# EAGLE board SparkFun_Pressure_Breakout-MPL115A1_Panel_v10 (EAGLE 7.5.0), part 1 of 2
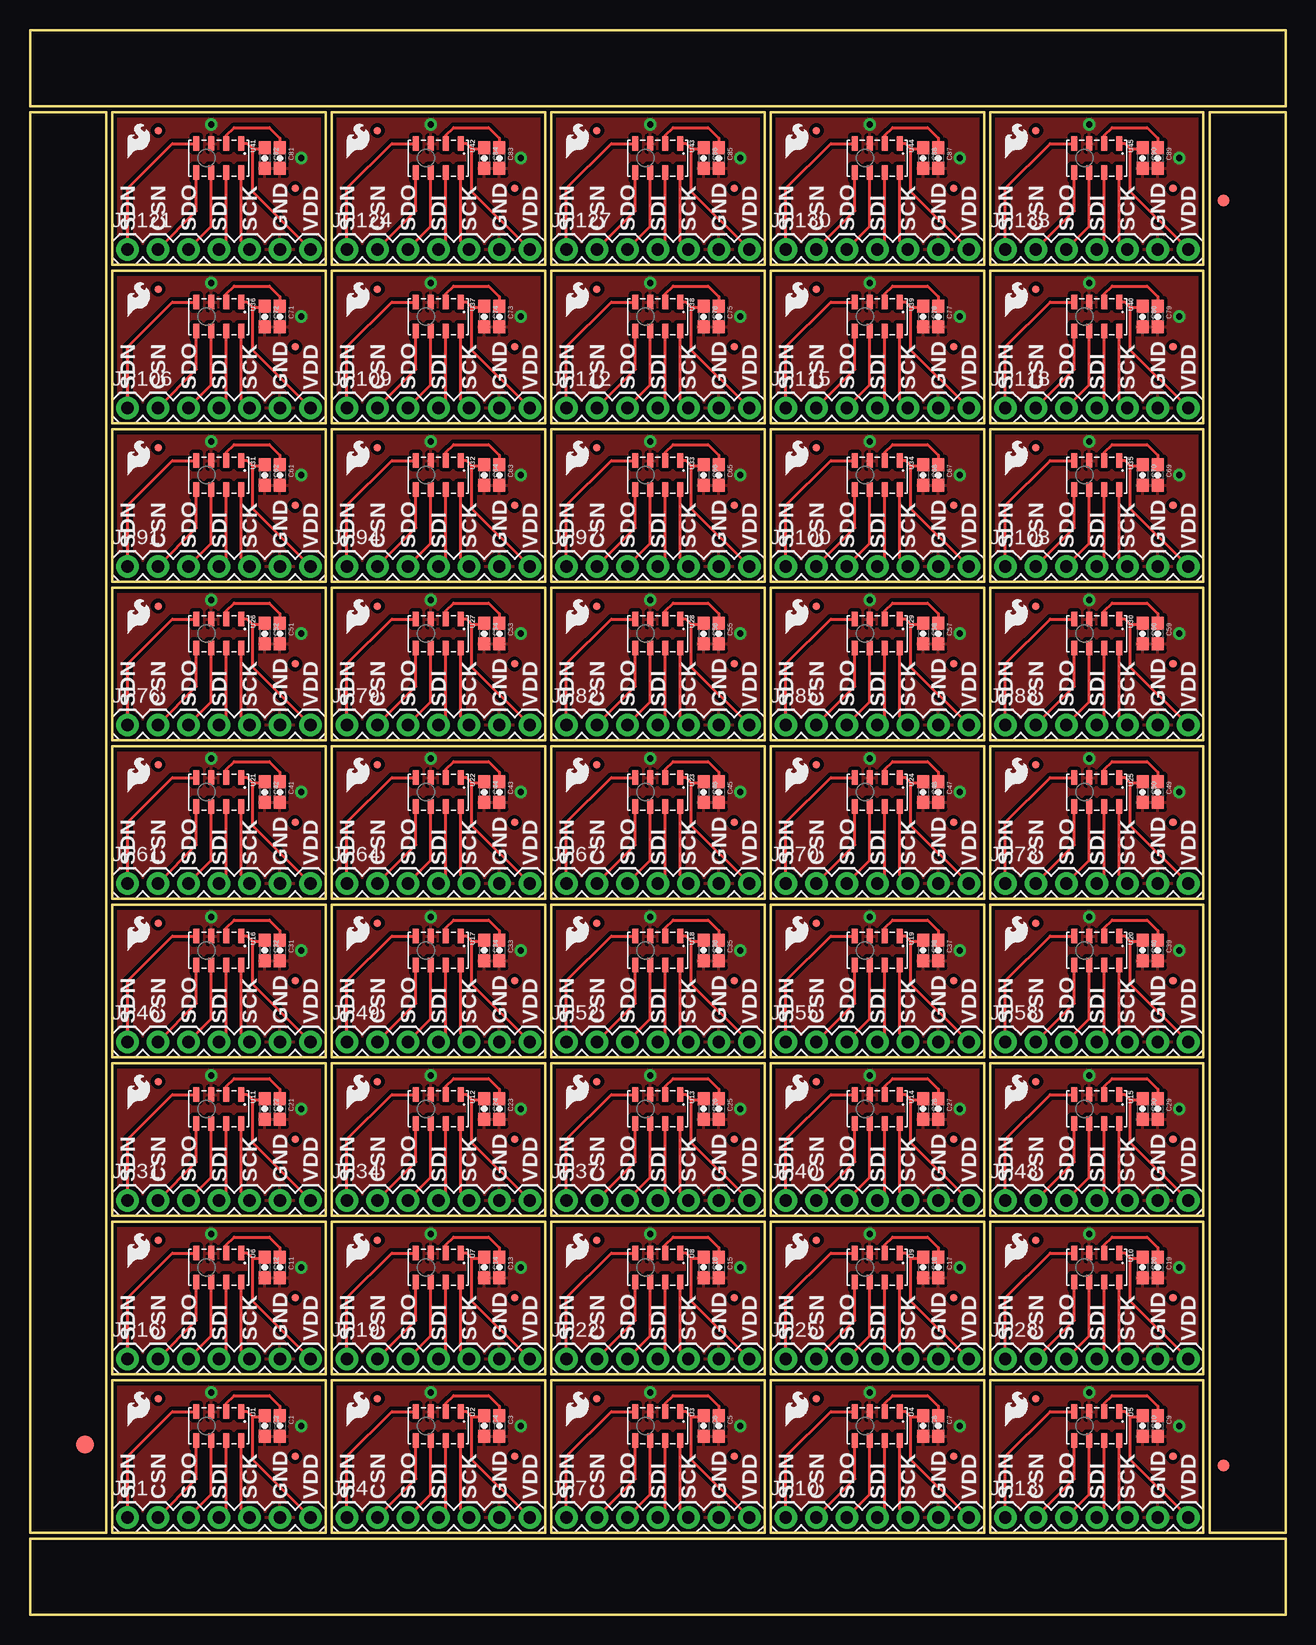
[diagram p0: board, top side]
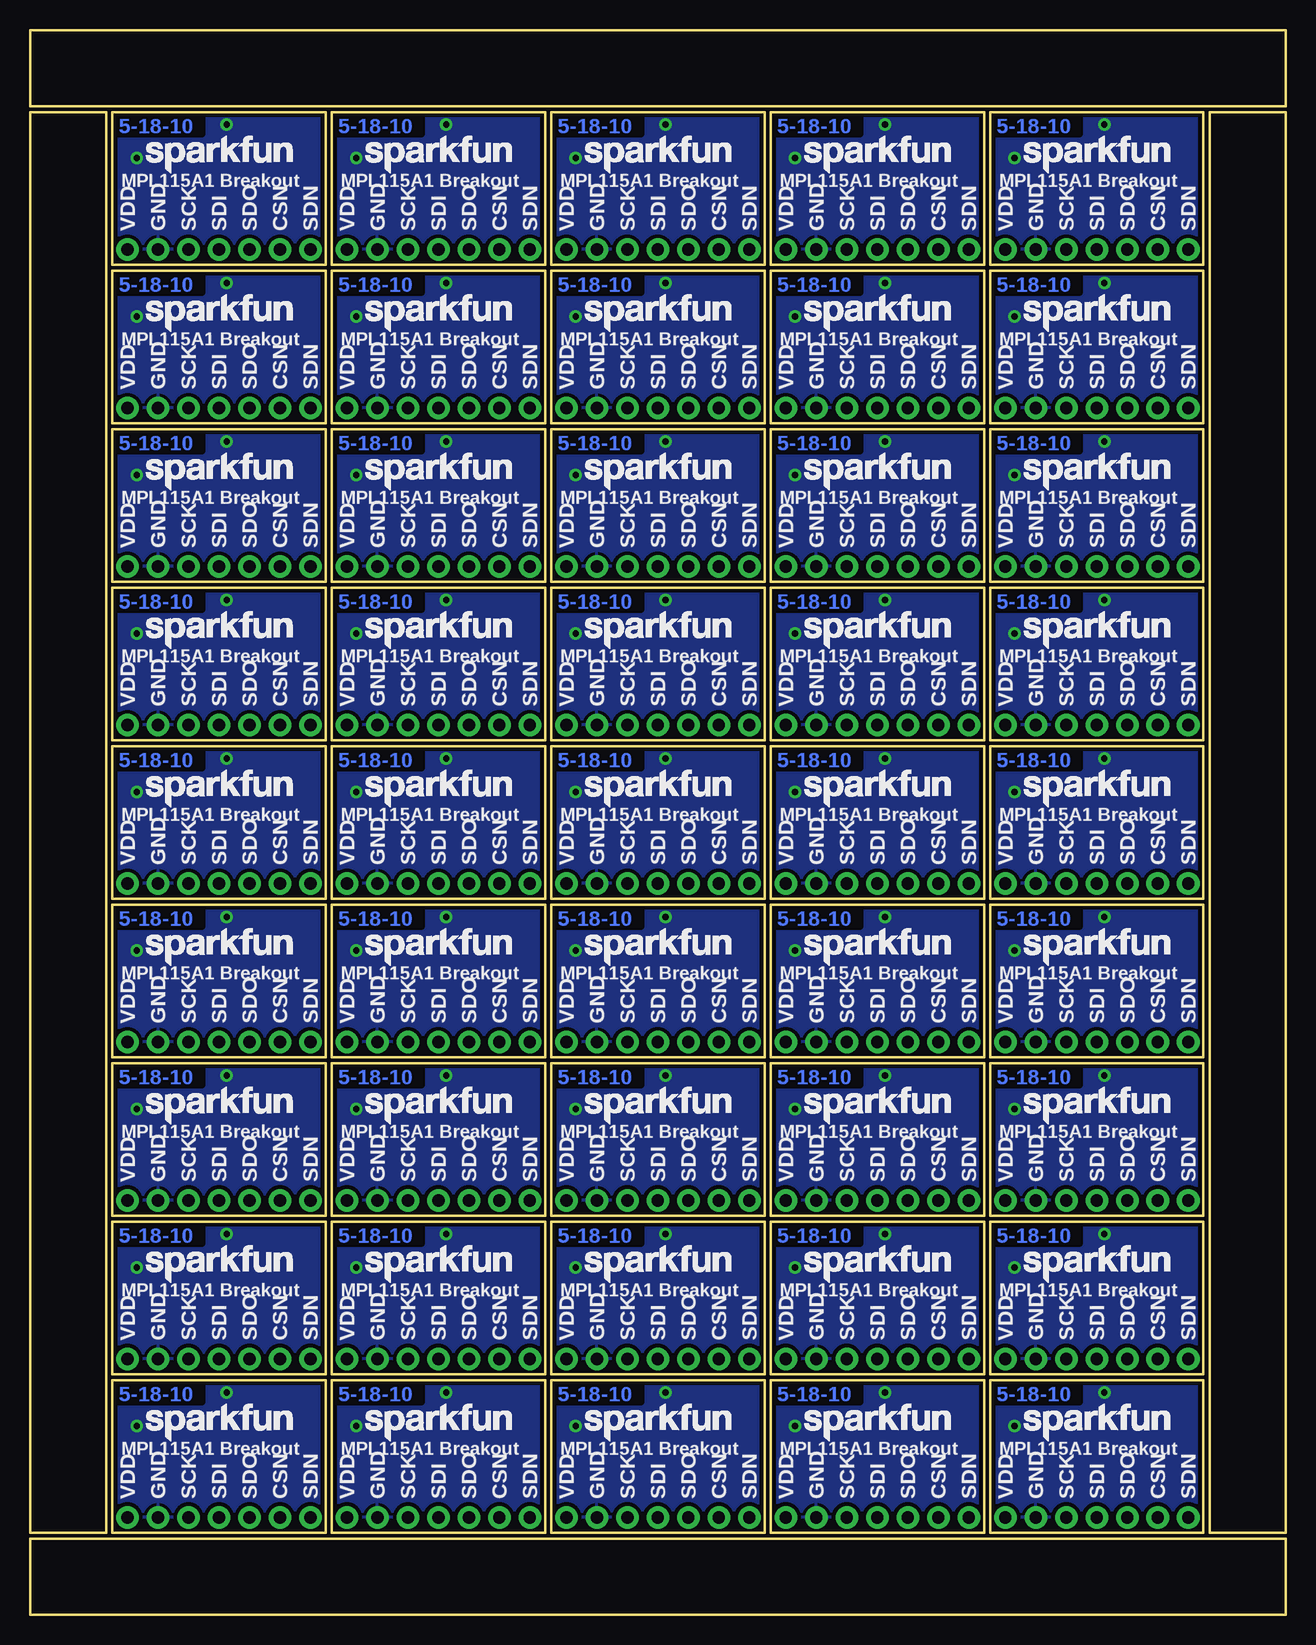
[diagram p1: board, bottom side, seen from below]

Size 104.65 x 132.08 mm. Coordinates in mm from the lower left corner, seen from the top.
Outline: 6.35,79.25 6.35,6.86 0,6.86 0,29.72
Outline: 0,27.18 0,125.22 6.35,125.22 6.35,76.71
Outline: 79.25,0 0,0 0,6.35 29.72,6.35
Outline: 27.18,6.35 104.65,6.35 104.65,0 76.71,0
Outline: 104.65,79.25 104.65,6.86 98.3,6.86 98.3,29.72
Outline: 98.3,27.18 98.3,125.22 104.65,125.22 104.65,76.71
Outline: 25.4,132.08 104.65,132.08 104.65,125.73 74.93,125.73
Outline: 77.47,125.73 0,125.73 0,132.08 27.94,132.08
Outline: 6.86,19.56 24.64,19.56 24.64,6.86 6.86,6.86 6.86,19.56
Outline: 25.15,19.56 42.93,19.56 42.93,6.86 25.15,6.86 25.15,19.56
Outline: 43.43,19.56 61.21,19.56 61.21,6.86 43.43,6.86 43.43,19.56
Outline: 61.72,19.56 79.5,19.56 79.5,6.86 61.72,6.86 61.72,19.56
Outline: 80.01,19.56 97.79,19.56 97.79,6.86 80.01,6.86 80.01,19.56
Outline: 6.86,32.77 24.64,32.77 24.64,20.07 6.86,20.07 6.86,32.77
Outline: 25.15,32.77 42.93,32.77 42.93,20.07 25.15,20.07 25.15,32.77
Outline: 43.43,32.77 61.21,32.77 61.21,20.07 43.43,20.07 43.43,32.77
Outline: 61.72,32.77 79.5,32.77 79.5,20.07 61.72,20.07 61.72,32.77
Outline: 80.01,32.77 97.79,32.77 97.79,20.07 80.01,20.07 80.01,32.77
Outline: 6.86,45.97 24.64,45.97 24.64,33.27 6.86,33.27 6.86,45.97
Outline: 25.15,45.97 42.93,45.97 42.93,33.27 25.15,33.27 25.15,45.97
Outline: 43.43,45.97 61.21,45.97 61.21,33.27 43.43,33.27 43.43,45.97
Outline: 61.72,45.97 79.5,45.97 79.5,33.27 61.72,33.27 61.72,45.97
Outline: 80.01,45.97 97.79,45.97 97.79,33.27 80.01,33.27 80.01,45.97
Outline: 6.86,59.18 24.64,59.18 24.64,46.48 6.86,46.48 6.86,59.18
Outline: 25.15,59.18 42.93,59.18 42.93,46.48 25.15,46.48 25.15,59.18
Outline: 43.43,59.18 61.21,59.18 61.21,46.48 43.43,46.48 43.43,59.18
Outline: 61.72,59.18 79.5,59.18 79.5,46.48 61.72,46.48 61.72,59.18
Outline: 80.01,59.18 97.79,59.18 97.79,46.48 80.01,46.48 80.01,59.18
Outline: 6.86,72.39 24.64,72.39 24.64,59.69 6.86,59.69 6.86,72.39
Outline: 25.15,72.39 42.93,72.39 42.93,59.69 25.15,59.69 25.15,72.39
Outline: 43.43,72.39 61.21,72.39 61.21,59.69 43.43,59.69 43.43,72.39
Outline: 61.72,72.39 79.5,72.39 79.5,59.69 61.72,59.69 61.72,72.39
Outline: 80.01,72.39 97.79,72.39 97.79,59.69 80.01,59.69 80.01,72.39
Outline: 6.86,85.6 24.64,85.6 24.64,72.9 6.86,72.9 6.86,85.6
Outline: 25.15,85.6 42.93,85.6 42.93,72.9 25.15,72.9 25.15,85.6
Outline: 43.43,85.6 61.21,85.6 61.21,72.9 43.43,72.9 43.43,85.6
Outline: 61.72,85.6 79.5,85.6 79.5,72.9 61.72,72.9 61.72,85.6
Outline: 80.01,85.6 97.79,85.6 97.79,72.9 80.01,72.9 80.01,85.6
Outline: 6.86,98.81 24.64,98.81 24.64,86.11 6.86,86.11 6.86,98.81
Outline: 25.15,98.81 42.93,98.81 42.93,86.11 25.15,86.11 25.15,98.81
Outline: 43.43,98.81 61.21,98.81 61.21,86.11 43.43,86.11 43.43,98.81
Outline: 61.72,98.81 79.5,98.81 79.5,86.11 61.72,86.11 61.72,98.81
Outline: 80.01,98.81 97.79,98.81 97.79,86.11 80.01,86.11 80.01,98.81
Outline: 6.86,112.01 24.64,112.01 24.64,99.31 6.86,99.31 6.86,112.01
Outline: 25.15,112.01 42.93,112.01 42.93,99.31 25.15,99.31 25.15,112.01
Outline: 43.43,112.01 61.21,112.01 61.21,99.31 43.43,99.31 43.43,112.01
Outline: 61.72,112.01 79.5,112.01 79.5,99.31 61.72,99.31 61.72,112.01
Outline: 80.01,112.01 97.79,112.01 97.79,99.31 80.01,99.31 80.01,112.01
Outline: 6.86,125.22 24.64,125.22 24.64,112.52 6.86,112.52 6.86,125.22
Outline: 25.15,125.22 42.93,125.22 42.93,112.52 25.15,112.52 25.15,125.22
Outline: 43.43,125.22 61.21,125.22 61.21,112.52 43.43,112.52 43.43,125.22
Outline: 61.72,125.22 79.5,125.22 79.5,112.52 61.72,112.52 61.72,125.22
Outline: 80.01,125.22 97.79,125.22 97.79,112.52 80.01,112.52 80.01,125.22
Copper layers (1*16): Top 0.035mm / dielectric 1.5mm / Bottom 0.035mm
Design rules "SparkFun": minimum track width 8mil, minimum drill 20mil, track to track 8mil, track to pad 8mil, pad to pad 8mil, via to via 8mil, smd to smd 8mil, copper to edge 9mil, drill to drill 8mil, minimum pad ring 12mil, minimum via ring 10mil, stop-mask expansion 4mil, vias tented up to drill 20mil, thermal gap 10mil

## Footprints (pad centres in the part's own frame; a part is rotated, then mirrored left to right if it is on the bottom)
0603-CAP = smd 1.1 x 1: 1 -0.85,0; 2 0.85,0
FIDUCIAL-1.5X3 = smd 1.5 x 1.5: 1 0,0
FIDUCIAL-1X2 = smd 1 x 1: 1 0,0
MICRO-FIDUCIAL = smd 0.635 x 0.635: 1 0,0
1X07 = drill 1.016 pad 1.88: 1 0,0; 2 2.54,0; 3 5.08,0; 4 7.62,0; 5 10.16,0; 6 12.7,0; 7 15.24,0
LGA8 = smd 1.2 x 0.5: 1 -1.2,1.875; 2 -1.2,0.625; 3 -1.2,-0.625; 4 -1.2,-1.875; 5 1.2,-1.875; 6 1.2,-0.625; 7 1.2,0.625; 8 1.2,1.875

## Placement (x,y rotation side)
C1  1uF  [0603-CAP]  20.83,15.75 270 top
C2  1uF  [0603-CAP]  19.56,15.75 270 top
C3  1uF  [0603-CAP]  39.12,15.75 270 top
C4  1uF  [0603-CAP]  37.85,15.75 270 top
C5  1uF  [0603-CAP]  57.4,15.75 270 top
C6  1uF  [0603-CAP]  56.13,15.75 270 top
C7  1uF  [0603-CAP]  75.69,15.75 270 top
C8  1uF  [0603-CAP]  74.42,15.75 270 top
C9  1uF  [0603-CAP]  93.98,15.75 270 top
C10  1uF  [0603-CAP]  92.71,15.75 270 top
C11  1uF  [0603-CAP]  20.83,28.96 270 top
C12  1uF  [0603-CAP]  19.56,28.96 270 top
C13  1uF  [0603-CAP]  39.12,28.96 270 top
C14  1uF  [0603-CAP]  37.85,28.96 270 top
C15  1uF  [0603-CAP]  57.4,28.96 270 top
C16  1uF  [0603-CAP]  56.13,28.96 270 top
C17  1uF  [0603-CAP]  75.69,28.96 270 top
C18  1uF  [0603-CAP]  74.42,28.96 270 top
C19  1uF  [0603-CAP]  93.98,28.96 270 top
C20  1uF  [0603-CAP]  92.71,28.96 270 top
C21  1uF  [0603-CAP]  20.83,42.16 270 top
C22  1uF  [0603-CAP]  19.56,42.16 270 top
C23  1uF  [0603-CAP]  39.12,42.16 270 top
C24  1uF  [0603-CAP]  37.85,42.16 270 top
C25  1uF  [0603-CAP]  57.4,42.16 270 top
C26  1uF  [0603-CAP]  56.13,42.16 270 top
C27  1uF  [0603-CAP]  75.69,42.16 270 top
C28  1uF  [0603-CAP]  74.42,42.16 270 top
C29  1uF  [0603-CAP]  93.98,42.16 270 top
C30  1uF  [0603-CAP]  92.71,42.16 270 top
C31  1uF  [0603-CAP]  20.83,55.37 270 top
C32  1uF  [0603-CAP]  19.56,55.37 270 top
C33  1uF  [0603-CAP]  39.12,55.37 270 top
C34  1uF  [0603-CAP]  37.85,55.37 270 top
C35  1uF  [0603-CAP]  57.4,55.37 270 top
C36  1uF  [0603-CAP]  56.13,55.37 270 top
C37  1uF  [0603-CAP]  75.69,55.37 270 top
C38  1uF  [0603-CAP]  74.42,55.37 270 top
C39  1uF  [0603-CAP]  93.98,55.37 270 top
C40  1uF  [0603-CAP]  92.71,55.37 270 top
C41  1uF  [0603-CAP]  20.83,68.58 270 top
C42  1uF  [0603-CAP]  19.56,68.58 270 top
C43  1uF  [0603-CAP]  39.12,68.58 270 top
C44  1uF  [0603-CAP]  37.85,68.58 270 top
C45  1uF  [0603-CAP]  57.4,68.58 270 top
C46  1uF  [0603-CAP]  56.13,68.58 270 top
C47  1uF  [0603-CAP]  75.69,68.58 270 top
C48  1uF  [0603-CAP]  74.42,68.58 270 top
C49  1uF  [0603-CAP]  93.98,68.58 270 top
C50  1uF  [0603-CAP]  92.71,68.58 270 top
C51  1uF  [0603-CAP]  20.83,81.79 270 top
C52  1uF  [0603-CAP]  19.56,81.79 270 top
C53  1uF  [0603-CAP]  39.12,81.79 270 top
C54  1uF  [0603-CAP]  37.85,81.79 270 top
C55  1uF  [0603-CAP]  57.4,81.79 270 top
C56  1uF  [0603-CAP]  56.13,81.79 270 top
C57  1uF  [0603-CAP]  75.69,81.79 270 top
C58  1uF  [0603-CAP]  74.42,81.79 270 top
C59  1uF  [0603-CAP]  93.98,81.79 270 top
C60  1uF  [0603-CAP]  92.71,81.79 270 top
C61  1uF  [0603-CAP]  20.83,95 270 top
C62  1uF  [0603-CAP]  19.56,95 270 top
C63  1uF  [0603-CAP]  39.12,95 270 top
C64  1uF  [0603-CAP]  37.85,95 270 top
C65  1uF  [0603-CAP]  57.4,95 270 top
C66  1uF  [0603-CAP]  56.13,95 270 top
C67  1uF  [0603-CAP]  75.69,95 270 top
C68  1uF  [0603-CAP]  74.42,95 270 top
C69  1uF  [0603-CAP]  93.98,95 270 top
C70  1uF  [0603-CAP]  92.71,95 270 top
C71  1uF  [0603-CAP]  20.83,108.2 270 top
C72  1uF  [0603-CAP]  19.56,108.2 270 top
C73  1uF  [0603-CAP]  39.12,108.2 270 top
C74  1uF  [0603-CAP]  37.85,108.2 270 top
C75  1uF  [0603-CAP]  57.4,108.2 270 top
C76  1uF  [0603-CAP]  56.13,108.2 270 top
C77  1uF  [0603-CAP]  75.69,108.2 270 top
C78  1uF  [0603-CAP]  74.42,108.2 270 top
C79  1uF  [0603-CAP]  93.98,108.2 270 top
C80  1uF  [0603-CAP]  92.71,108.2 270 top
C81  1uF  [0603-CAP]  20.83,121.41 270 top
C82  1uF  [0603-CAP]  19.56,121.41 270 top
C83  1uF  [0603-CAP]  39.12,121.41 270 top
C84  1uF  [0603-CAP]  37.85,121.41 270 top
C85  1uF  [0603-CAP]  57.4,121.41 270 top
C86  1uF  [0603-CAP]  56.13,121.41 270 top
C87  1uF  [0603-CAP]  75.69,121.41 270 top
C88  1uF  [0603-CAP]  74.42,121.41 270 top
C89  1uF  [0603-CAP]  93.98,121.41 270 top
C90  1uF  [0603-CAP]  92.71,121.41 270 top
E$1  [FIDUCIAL-1.5X3]  4.57,14.22 0 top
E$5  [FIDUCIAL-1X2]  99.44,12.45 0 top
E$6  [FIDUCIAL-1X2]  99.44,117.86 180 top
FID1  FIDUCIALUFIDUCIAL  [MICRO-FIDUCIAL]  10.67,18.03 0 top
FID2  FIDUCIALUFIDUCIAL  [MICRO-FIDUCIAL]  22.1,13.21 0 top
FID3  FIDUCIALUFIDUCIAL  [MICRO-FIDUCIAL]  28.96,18.03 0 top
FID4  FIDUCIALUFIDUCIAL  [MICRO-FIDUCIAL]  40.39,13.21 0 top
FID5  FIDUCIALUFIDUCIAL  [MICRO-FIDUCIAL]  47.24,18.03 0 top
FID6  FIDUCIALUFIDUCIAL  [MICRO-FIDUCIAL]  58.67,13.21 0 top
FID7  FIDUCIALUFIDUCIAL  [MICRO-FIDUCIAL]  65.53,18.03 0 top
FID8  FIDUCIALUFIDUCIAL  [MICRO-FIDUCIAL]  76.96,13.21 0 top
FID9  FIDUCIALUFIDUCIAL  [MICRO-FIDUCIAL]  83.82,18.03 0 top
FID10  FIDUCIALUFIDUCIAL  [MICRO-FIDUCIAL]  95.25,13.21 0 top
FID11  FIDUCIALUFIDUCIAL  [MICRO-FIDUCIAL]  10.67,31.24 0 top
FID12  FIDUCIALUFIDUCIAL  [MICRO-FIDUCIAL]  22.1,26.42 0 top
FID13  FIDUCIALUFIDUCIAL  [MICRO-FIDUCIAL]  28.96,31.24 0 top
FID14  FIDUCIALUFIDUCIAL  [MICRO-FIDUCIAL]  40.39,26.42 0 top
FID15  FIDUCIALUFIDUCIAL  [MICRO-FIDUCIAL]  47.24,31.24 0 top
FID16  FIDUCIALUFIDUCIAL  [MICRO-FIDUCIAL]  58.67,26.42 0 top
FID17  FIDUCIALUFIDUCIAL  [MICRO-FIDUCIAL]  65.53,31.24 0 top
FID18  FIDUCIALUFIDUCIAL  [MICRO-FIDUCIAL]  76.96,26.42 0 top
FID19  FIDUCIALUFIDUCIAL  [MICRO-FIDUCIAL]  83.82,31.24 0 top
FID20  FIDUCIALUFIDUCIAL  [MICRO-FIDUCIAL]  95.25,26.42 0 top
FID21  FIDUCIALUFIDUCIAL  [MICRO-FIDUCIAL]  10.67,44.45 0 top
FID22  FIDUCIALUFIDUCIAL  [MICRO-FIDUCIAL]  22.1,39.62 0 top
FID23  FIDUCIALUFIDUCIAL  [MICRO-FIDUCIAL]  28.96,44.45 0 top
FID24  FIDUCIALUFIDUCIAL  [MICRO-FIDUCIAL]  40.39,39.62 0 top
FID25  FIDUCIALUFIDUCIAL  [MICRO-FIDUCIAL]  47.24,44.45 0 top
FID26  FIDUCIALUFIDUCIAL  [MICRO-FIDUCIAL]  58.67,39.62 0 top
FID27  FIDUCIALUFIDUCIAL  [MICRO-FIDUCIAL]  65.53,44.45 0 top
FID28  FIDUCIALUFIDUCIAL  [MICRO-FIDUCIAL]  76.96,39.62 0 top
FID29  FIDUCIALUFIDUCIAL  [MICRO-FIDUCIAL]  83.82,44.45 0 top
FID30  FIDUCIALUFIDUCIAL  [MICRO-FIDUCIAL]  95.25,39.62 0 top
FID31  FIDUCIALUFIDUCIAL  [MICRO-FIDUCIAL]  10.67,57.66 0 top
FID32  FIDUCIALUFIDUCIAL  [MICRO-FIDUCIAL]  22.1,52.83 0 top
FID33  FIDUCIALUFIDUCIAL  [MICRO-FIDUCIAL]  28.96,57.66 0 top
FID34  FIDUCIALUFIDUCIAL  [MICRO-FIDUCIAL]  40.39,52.83 0 top
FID35  FIDUCIALUFIDUCIAL  [MICRO-FIDUCIAL]  47.24,57.66 0 top
FID36  FIDUCIALUFIDUCIAL  [MICRO-FIDUCIAL]  58.67,52.83 0 top
FID37  FIDUCIALUFIDUCIAL  [MICRO-FIDUCIAL]  65.53,57.66 0 top
FID38  FIDUCIALUFIDUCIAL  [MICRO-FIDUCIAL]  76.96,52.83 0 top
FID39  FIDUCIALUFIDUCIAL  [MICRO-FIDUCIAL]  83.82,57.66 0 top
FID40  FIDUCIALUFIDUCIAL  [MICRO-FIDUCIAL]  95.25,52.83 0 top
FID41  FIDUCIALUFIDUCIAL  [MICRO-FIDUCIAL]  10.67,70.87 0 top
FID42  FIDUCIALUFIDUCIAL  [MICRO-FIDUCIAL]  22.1,66.04 0 top
FID43  FIDUCIALUFIDUCIAL  [MICRO-FIDUCIAL]  28.96,70.87 0 top
FID44  FIDUCIALUFIDUCIAL  [MICRO-FIDUCIAL]  40.39,66.04 0 top
FID45  FIDUCIALUFIDUCIAL  [MICRO-FIDUCIAL]  47.24,70.87 0 top
FID46  FIDUCIALUFIDUCIAL  [MICRO-FIDUCIAL]  58.67,66.04 0 top
FID47  FIDUCIALUFIDUCIAL  [MICRO-FIDUCIAL]  65.53,70.87 0 top
FID48  FIDUCIALUFIDUCIAL  [MICRO-FIDUCIAL]  76.96,66.04 0 top
FID49  FIDUCIALUFIDUCIAL  [MICRO-FIDUCIAL]  83.82,70.87 0 top
FID50  FIDUCIALUFIDUCIAL  [MICRO-FIDUCIAL]  95.25,66.04 0 top
FID51  FIDUCIALUFIDUCIAL  [MICRO-FIDUCIAL]  10.67,84.07 0 top
FID52  FIDUCIALUFIDUCIAL  [MICRO-FIDUCIAL]  22.1,79.25 0 top
FID53  FIDUCIALUFIDUCIAL  [MICRO-FIDUCIAL]  28.96,84.07 0 top
FID54  FIDUCIALUFIDUCIAL  [MICRO-FIDUCIAL]  40.39,79.25 0 top
FID55  FIDUCIALUFIDUCIAL  [MICRO-FIDUCIAL]  47.24,84.07 0 top
FID56  FIDUCIALUFIDUCIAL  [MICRO-FIDUCIAL]  58.67,79.25 0 top
FID57  FIDUCIALUFIDUCIAL  [MICRO-FIDUCIAL]  65.53,84.07 0 top
FID58  FIDUCIALUFIDUCIAL  [MICRO-FIDUCIAL]  76.96,79.25 0 top
FID59  FIDUCIALUFIDUCIAL  [MICRO-FIDUCIAL]  83.82,84.07 0 top
FID60  FIDUCIALUFIDUCIAL  [MICRO-FIDUCIAL]  95.25,79.25 0 top
FID61  FIDUCIALUFIDUCIAL  [MICRO-FIDUCIAL]  10.67,97.28 0 top
FID62  FIDUCIALUFIDUCIAL  [MICRO-FIDUCIAL]  22.1,92.46 0 top
FID63  FIDUCIALUFIDUCIAL  [MICRO-FIDUCIAL]  28.96,97.28 0 top
FID64  FIDUCIALUFIDUCIAL  [MICRO-FIDUCIAL]  40.39,92.46 0 top
FID65  FIDUCIALUFIDUCIAL  [MICRO-FIDUCIAL]  47.24,97.28 0 top
FID66  FIDUCIALUFIDUCIAL  [MICRO-FIDUCIAL]  58.67,92.46 0 top
FID67  FIDUCIALUFIDUCIAL  [MICRO-FIDUCIAL]  65.53,97.28 0 top
FID68  FIDUCIALUFIDUCIAL  [MICRO-FIDUCIAL]  76.96,92.46 0 top
FID69  FIDUCIALUFIDUCIAL  [MICRO-FIDUCIAL]  83.82,97.28 0 top
FID70  FIDUCIALUFIDUCIAL  [MICRO-FIDUCIAL]  95.25,92.46 0 top
FID71  FIDUCIALUFIDUCIAL  [MICRO-FIDUCIAL]  10.67,110.49 0 top
FID72  FIDUCIALUFIDUCIAL  [MICRO-FIDUCIAL]  22.1,105.66 0 top
FID73  FIDUCIALUFIDUCIAL  [MICRO-FIDUCIAL]  28.96,110.49 0 top
FID74  FIDUCIALUFIDUCIAL  [MICRO-FIDUCIAL]  40.39,105.66 0 top
FID75  FIDUCIALUFIDUCIAL  [MICRO-FIDUCIAL]  47.24,110.49 0 top
FID76  FIDUCIALUFIDUCIAL  [MICRO-FIDUCIAL]  58.67,105.66 0 top
FID77  FIDUCIALUFIDUCIAL  [MICRO-FIDUCIAL]  65.53,110.49 0 top
FID78  FIDUCIALUFIDUCIAL  [MICRO-FIDUCIAL]  76.96,105.66 0 top
FID79  FIDUCIALUFIDUCIAL  [MICRO-FIDUCIAL]  83.82,110.49 0 top
FID80  FIDUCIALUFIDUCIAL  [MICRO-FIDUCIAL]  95.25,105.66 0 top
FID81  FIDUCIALUFIDUCIAL  [MICRO-FIDUCIAL]  10.67,123.7 0 top
FID82  FIDUCIALUFIDUCIAL  [MICRO-FIDUCIAL]  22.1,118.87 0 top
FID83  FIDUCIALUFIDUCIAL  [MICRO-FIDUCIAL]  28.96,123.7 0 top
FID84  FIDUCIALUFIDUCIAL  [MICRO-FIDUCIAL]  40.39,118.87 0 top
FID85  FIDUCIALUFIDUCIAL  [MICRO-FIDUCIAL]  47.24,123.7 0 top
FID86  FIDUCIALUFIDUCIAL  [MICRO-FIDUCIAL]  58.67,118.87 0 top
FID87  FIDUCIALUFIDUCIAL  [MICRO-FIDUCIAL]  65.53,123.7 0 top
FID88  FIDUCIALUFIDUCIAL  [MICRO-FIDUCIAL]  76.96,118.87 0 top
FID89  FIDUCIALUFIDUCIAL  [MICRO-FIDUCIAL]  83.82,123.7 0 top
FID90  FIDUCIALUFIDUCIAL  [MICRO-FIDUCIAL]  95.25,118.87 0 top
JP1  [1X07]  8.13,8.13 0 top
JP2  LOGO-SFESK  [SFE-LOGO-FLAME]  8.13,15.75 0 top
JP3  LOGO-SFENW2  [SFE-NEW-WEB]  21.84,14.48 0 bottom
JP4  [1X07]  26.42,8.13 0 top
JP5  LOGO-SFESK  [SFE-LOGO-FLAME]  26.42,15.75 0 top
JP6  LOGO-SFENW2  [SFE-NEW-WEB]  40.13,14.48 0 bottom
JP7  [1X07]  44.7,8.13 0 top
JP8  LOGO-SFESK  [SFE-LOGO-FLAME]  44.7,15.75 0 top
JP9  LOGO-SFENW2  [SFE-NEW-WEB]  58.42,14.48 0 bottom
JP10  [1X07]  62.99,8.13 0 top
JP11  LOGO-SFESK  [SFE-LOGO-FLAME]  62.99,15.75 0 top
JP12  LOGO-SFENW2  [SFE-NEW-WEB]  76.71,14.48 0 bottom
JP13  [1X07]  81.28,8.13 0 top
JP14  LOGO-SFESK  [SFE-LOGO-FLAME]  81.28,15.75 0 top
JP15  LOGO-SFENW2  [SFE-NEW-WEB]  95,14.48 0 bottom
JP16  [1X07]  8.13,21.34 0 top
JP17  LOGO-SFESK  [SFE-LOGO-FLAME]  8.13,28.96 0 top
JP18  LOGO-SFENW2  [SFE-NEW-WEB]  21.84,27.69 0 bottom
JP19  [1X07]  26.42,21.34 0 top
JP20  LOGO-SFESK  [SFE-LOGO-FLAME]  26.42,28.96 0 top
JP21  LOGO-SFENW2  [SFE-NEW-WEB]  40.13,27.69 0 bottom
JP22  [1X07]  44.7,21.34 0 top
JP23  LOGO-SFESK  [SFE-LOGO-FLAME]  44.7,28.96 0 top
JP24  LOGO-SFENW2  [SFE-NEW-WEB]  58.42,27.69 0 bottom
JP25  [1X07]  62.99,21.34 0 top
JP26  LOGO-SFESK  [SFE-LOGO-FLAME]  62.99,28.96 0 top
JP27  LOGO-SFENW2  [SFE-NEW-WEB]  76.71,27.69 0 bottom
JP28  [1X07]  81.28,21.34 0 top
JP29  LOGO-SFESK  [SFE-LOGO-FLAME]  81.28,28.96 0 top
JP30  LOGO-SFENW2  [SFE-NEW-WEB]  95,27.69 0 bottom
JP31  [1X07]  8.13,34.54 0 top
JP32  LOGO-SFESK  [SFE-LOGO-FLAME]  8.13,42.16 0 top
JP33  LOGO-SFENW2  [SFE-NEW-WEB]  21.84,40.89 0 bottom
JP34  [1X07]  26.42,34.54 0 top
JP35  LOGO-SFESK  [SFE-LOGO-FLAME]  26.42,42.16 0 top
JP36  LOGO-SFENW2  [SFE-NEW-WEB]  40.13,40.89 0 bottom
JP37  [1X07]  44.7,34.54 0 top
JP38  LOGO-SFESK  [SFE-LOGO-FLAME]  44.7,42.16 0 top
JP39  LOGO-SFENW2  [SFE-NEW-WEB]  58.42,40.89 0 bottom
JP40  [1X07]  62.99,34.54 0 top
JP41  LOGO-SFESK  [SFE-LOGO-FLAME]  62.99,42.16 0 top
JP42  LOGO-SFENW2  [SFE-NEW-WEB]  76.71,40.89 0 bottom
JP43  [1X07]  81.28,34.54 0 top
JP44  LOGO-SFESK  [SFE-LOGO-FLAME]  81.28,42.16 0 top
JP45  LOGO-SFENW2  [SFE-NEW-WEB]  95,40.89 0 bottom
JP46  [1X07]  8.13,47.75 0 top
JP47  LOGO-SFESK  [SFE-LOGO-FLAME]  8.13,55.37 0 top
JP48  LOGO-SFENW2  [SFE-NEW-WEB]  21.84,54.1 0 bottom
JP49  [1X07]  26.42,47.75 0 top
JP50  LOGO-SFESK  [SFE-LOGO-FLAME]  26.42,55.37 0 top
JP51  LOGO-SFENW2  [SFE-NEW-WEB]  40.13,54.1 0 bottom
JP52  [1X07]  44.7,47.75 0 top
JP53  LOGO-SFESK  [SFE-LOGO-FLAME]  44.7,55.37 0 top
JP54  LOGO-SFENW2  [SFE-NEW-WEB]  58.42,54.1 0 bottom
JP55  [1X07]  62.99,47.75 0 top
JP56  LOGO-SFESK  [SFE-LOGO-FLAME]  62.99,55.37 0 top
JP57  LOGO-SFENW2  [SFE-NEW-WEB]  76.71,54.1 0 bottom
JP58  [1X07]  81.28,47.75 0 top
JP59  LOGO-SFESK  [SFE-LOGO-FLAME]  81.28,55.37 0 top
JP60  LOGO-SFENW2  [SFE-NEW-WEB]  95,54.1 0 bottom
JP61  [1X07]  8.13,60.96 0 top
JP62  LOGO-SFESK  [SFE-LOGO-FLAME]  8.13,68.58 0 top
JP63  LOGO-SFENW2  [SFE-NEW-WEB]  21.84,67.31 0 bottom
JP64  [1X07]  26.42,60.96 0 top
JP65  LOGO-SFESK  [SFE-LOGO-FLAME]  26.42,68.58 0 top
JP66  LOGO-SFENW2  [SFE-NEW-WEB]  40.13,67.31 0 bottom
JP67  [1X07]  44.7,60.96 0 top
JP68  LOGO-SFESK  [SFE-LOGO-FLAME]  44.7,68.58 0 top
JP69  LOGO-SFENW2  [SFE-NEW-WEB]  58.42,67.31 0 bottom
JP70  [1X07]  62.99,60.96 0 top
JP71  LOGO-SFESK  [SFE-LOGO-FLAME]  62.99,68.58 0 top
JP72  LOGO-SFENW2  [SFE-NEW-WEB]  76.71,67.31 0 bottom
JP73  [1X07]  81.28,60.96 0 top
JP74  LOGO-SFESK  [SFE-LOGO-FLAME]  81.28,68.58 0 top
JP75  LOGO-SFENW2  [SFE-NEW-WEB]  95,67.31 0 bottom
JP76  [1X07]  8.13,74.17 0 top
JP77  LOGO-SFESK  [SFE-LOGO-FLAME]  8.13,81.79 0 top
JP78  LOGO-SFENW2  [SFE-NEW-WEB]  21.84,80.52 0 bottom
JP79  [1X07]  26.42,74.17 0 top
JP80  LOGO-SFESK  [SFE-LOGO-FLAME]  26.42,81.79 0 top
JP81  LOGO-SFENW2  [SFE-NEW-WEB]  40.13,80.52 0 bottom
JP82  [1X07]  44.7,74.17 0 top
JP83  LOGO-SFESK  [SFE-LOGO-FLAME]  44.7,81.79 0 top
JP84  LOGO-SFENW2  [SFE-NEW-WEB]  58.42,80.52 0 bottom
JP85  [1X07]  62.99,74.17 0 top
JP86  LOGO-SFESK  [SFE-LOGO-FLAME]  62.99,81.79 0 top
JP87  LOGO-SFENW2  [SFE-NEW-WEB]  76.71,80.52 0 bottom
JP88  [1X07]  81.28,74.17 0 top
JP89  LOGO-SFESK  [SFE-LOGO-FLAME]  81.28,81.79 0 top
JP90  LOGO-SFENW2  [SFE-NEW-WEB]  95,80.52 0 bottom
JP91  [1X07]  8.13,87.38 0 top
JP92  LOGO-SFESK  [SFE-LOGO-FLAME]  8.13,95 0 top
JP93  LOGO-SFENW2  [SFE-NEW-WEB]  21.84,93.73 0 bottom
JP94  [1X07]  26.42,87.38 0 top
JP95  LOGO-SFESK  [SFE-LOGO-FLAME]  26.42,95 0 top
JP96  LOGO-SFENW2  [SFE-NEW-WEB]  40.13,93.73 0 bottom
JP97  [1X07]  44.7,87.38 0 top
JP98  LOGO-SFESK  [SFE-LOGO-FLAME]  44.7,95 0 top
JP99  LOGO-SFENW2  [SFE-NEW-WEB]  58.42,93.73 0 bottom
JP100  [1X07]  62.99,87.38 0 top
JP101  LOGO-SFESK  [SFE-LOGO-FLAME]  62.99,95 0 top
JP102  LOGO-SFENW2  [SFE-NEW-WEB]  76.71,93.73 0 bottom
JP103  [1X07]  81.28,87.38 0 top
JP104  LOGO-SFESK  [SFE-LOGO-FLAME]  81.28,95 0 top
JP105  LOGO-SFENW2  [SFE-NEW-WEB]  95,93.73 0 bottom
JP106  [1X07]  8.13,100.58 0 top
JP107  LOGO-SFESK  [SFE-LOGO-FLAME]  8.13,108.2 0 top
JP108  LOGO-SFENW2  [SFE-NEW-WEB]  21.84,106.93 0 bottom
JP109  [1X07]  26.42,100.58 0 top
JP110  LOGO-SFESK  [SFE-LOGO-FLAME]  26.42,108.2 0 top
JP111  LOGO-SFENW2  [SFE-NEW-WEB]  40.13,106.93 0 bottom
JP112  [1X07]  44.7,100.58 0 top
JP113  LOGO-SFESK  [SFE-LOGO-FLAME]  44.7,108.2 0 top
JP114  LOGO-SFENW2  [SFE-NEW-WEB]  58.42,106.93 0 bottom
JP115  [1X07]  62.99,100.58 0 top
JP116  LOGO-SFESK  [SFE-LOGO-FLAME]  62.99,108.2 0 top
JP117  LOGO-SFENW2  [SFE-NEW-WEB]  76.71,106.93 0 bottom
JP118  [1X07]  81.28,100.58 0 top
JP119  LOGO-SFESK  [SFE-LOGO-FLAME]  81.28,108.2 0 top
JP120  LOGO-SFENW2  [SFE-NEW-WEB]  95,106.93 0 bottom
JP121  [1X07]  8.13,113.79 0 top
JP122  LOGO-SFESK  [SFE-LOGO-FLAME]  8.13,121.41 0 top
JP123  LOGO-SFENW2  [SFE-NEW-WEB]  21.84,120.14 0 bottom
JP124  [1X07]  26.42,113.79 0 top
JP125  LOGO-SFESK  [SFE-LOGO-FLAME]  26.42,121.41 0 top
JP126  LOGO-SFENW2  [SFE-NEW-WEB]  40.13,120.14 0 bottom
JP127  [1X07]  44.7,113.79 0 top
JP128  LOGO-SFESK  [SFE-LOGO-FLAME]  44.7,121.41 0 top
JP129  LOGO-SFENW2  [SFE-NEW-WEB]  58.42,120.14 0 bottom
JP130  [1X07]  62.99,113.79 0 top
JP131  LOGO-SFESK  [SFE-LOGO-FLAME]  62.99,121.41 0 top
JP132  LOGO-SFENW2  [SFE-NEW-WEB]  76.71,120.14 0 bottom
JP133  [1X07]  81.28,113.79 0 top
JP134  LOGO-SFESK  [SFE-LOGO-FLAME]  81.28,121.41 0 top
JP135  LOGO-SFENW2  [SFE-NEW-WEB]  95,120.14 0 bottom
U1  MPL115A  [LGA8]  15.75,15.75 270 top
U2  MPL115A  [LGA8]  34.04,15.75 270 top
U3  MPL115A  [LGA8]  52.32,15.75 270 top
U4  MPL115A  [LGA8]  70.61,15.75 270 top
U5  MPL115A  [LGA8]  88.9,15.75 270 top
U6  MPL115A  [LGA8]  15.75,28.96 270 top
U7  MPL115A  [LGA8]  34.04,28.96 270 top
U8  MPL115A  [LGA8]  52.32,28.96 270 top
U9  MPL115A  [LGA8]  70.61,28.96 270 top
U10  MPL115A  [LGA8]  88.9,28.96 270 top
U11  MPL115A  [LGA8]  15.75,42.16 270 top
U12  MPL115A  [LGA8]  34.04,42.16 270 top
U13  MPL115A  [LGA8]  52.32,42.16 270 top
U14  MPL115A  [LGA8]  70.61,42.16 270 top
U15  MPL115A  [LGA8]  88.9,42.16 270 top
U16  MPL115A  [LGA8]  15.75,55.37 270 top
U17  MPL115A  [LGA8]  34.04,55.37 270 top
U18  MPL115A  [LGA8]  52.32,55.37 270 top
U19  MPL115A  [LGA8]  70.61,55.37 270 top
U20  MPL115A  [LGA8]  88.9,55.37 270 top
U21  MPL115A  [LGA8]  15.75,68.58 270 top
U22  MPL115A  [LGA8]  34.04,68.58 270 top
U23  MPL115A  [LGA8]  52.32,68.58 270 top
U24  MPL115A  [LGA8]  70.61,68.58 270 top
U25  MPL115A  [LGA8]  88.9,68.58 270 top
U26  MPL115A  [LGA8]  15.75,81.79 270 top
U27  MPL115A  [LGA8]  34.04,81.79 270 top
U28  MPL115A  [LGA8]  52.32,81.79 270 top
U29  MPL115A  [LGA8]  70.61,81.79 270 top
U30  MPL115A  [LGA8]  88.9,81.79 270 top
U31  MPL115A  [LGA8]  15.75,95 270 top
U32  MPL115A  [LGA8]  34.04,95 270 top
U33  MPL115A  [LGA8]  52.32,95 270 top
U34  MPL115A  [LGA8]  70.61,95 270 top
U35  MPL115A  [LGA8]  88.9,95 270 top
U36  MPL115A  [LGA8]  15.75,108.2 270 top
U37  MPL115A  [LGA8]  34.04,108.2 270 top
U38  MPL115A  [LGA8]  52.32,108.2 270 top
U39  MPL115A  [LGA8]  70.61,108.2 270 top
U40  MPL115A  [LGA8]  88.9,108.2 270 top
U41  MPL115A  [LGA8]  15.75,121.41 270 top
U42  MPL115A  [LGA8]  34.04,121.41 270 top
U43  MPL115A  [LGA8]  52.32,121.41 270 top
U44  MPL115A  [LGA8]  70.61,121.41 270 top
U45  MPL115A  [LGA8]  88.9,121.41 270 top

## Library data of the parts
C1-C90 JP1-JP135 U1-U45 = SparkFun
E$1 = SparkFun-Retired
E$5 E$6 FID1-FID90 = SparkFun-Aesthetics

## Nets
CAP: C1.1 U1.2
CAP1: C3.1 U2.2
CAP2: C5.1 U3.2
CAP3: C7.1 U4.2
CAP4: C9.1 U5.2
CAP5: C11.1 U6.2
CAP6: C13.1 U7.2
CAP7: C15.1 U8.2
CAP8: C17.1 U9.2
CAP9: C19.1 U10.2
CAP10: C21.1 U11.2
CAP11: C23.1 U12.2
CAP12: C25.1 U13.2
CAP13: C27.1 U14.2
CAP14: C29.1 U15.2
CAP15: C31.1 U16.2
CAP16: C33.1 U17.2
CAP17: C35.1 U18.2
CAP18: C37.1 U19.2
CAP19: C39.1 U20.2
CAP20: C41.1 U21.2
CAP21: C43.1 U22.2
CAP22: C45.1 U23.2
CAP23: C47.1 U24.2
CAP24: C49.1 U25.2
CAP25: C51.1 U26.2
CAP26: C53.1 U27.2
CAP27: C55.1 U28.2
CAP28: C57.1 U29.2
CAP29: C59.1 U30.2
CAP30: C61.1 U31.2
CAP31: C63.1 U32.2
CAP32: C65.1 U33.2
CAP33: C67.1 U34.2
CAP34: C69.1 U35.2
CAP35: C71.1 U36.2
CAP36: C73.1 U37.2
CAP37: C75.1 U38.2
CAP38: C77.1 U39.2
CAP39: C79.1 U40.2
CAP40: C81.1 U41.2
CAP41: C83.1 U42.2
CAP42: C85.1 U43.2
CAP43: C87.1 U44.2
CAP44: C89.1 U45.2
CSN: JP1.2 U1.5
CSN1: JP4.2 U2.5
CSN2: JP7.2 U3.5
CSN3: JP10.2 U4.5
CSN4: JP13.2 U5.5
CSN5: JP16.2 U6.5
CSN6: JP19.2 U7.5
CSN7: JP22.2 U8.5
CSN8: JP25.2 U9.5
CSN9: JP28.2 U10.5
CSN10: JP31.2 U11.5
CSN11: JP34.2 U12.5
CSN12: JP37.2 U13.5
CSN13: JP40.2 U14.5
CSN14: JP43.2 U15.5
CSN15: JP46.2 U16.5
CSN16: JP49.2 U17.5
CSN17: JP52.2 U18.5
CSN18: JP55.2 U19.5
CSN19: JP58.2 U20.5
CSN20: JP61.2 U21.5
CSN21: JP64.2 U22.5
CSN22: JP67.2 U23.5
CSN23: JP70.2 U24.5
CSN24: JP73.2 U25.5
CSN25: JP76.2 U26.5
CSN26: JP79.2 U27.5
CSN27: JP82.2 U28.5
CSN28: JP85.2 U29.5
CSN29: JP88.2 U30.5
CSN30: JP91.2 U31.5
CSN31: JP94.2 U32.5
CSN32: JP97.2 U33.5
CSN33: JP100.2 U34.5
CSN34: JP103.2 U35.5
CSN35: JP106.2 U36.5
CSN36: JP109.2 U37.5
CSN37: JP112.2 U38.5
CSN38: JP115.2 U39.5
CSN39: JP118.2 U40.5
CSN40: JP121.2 U41.5
CSN41: JP124.2 U42.5
CSN42: JP127.2 U43.5
CSN43: JP130.2 U44.5
CSN44: JP133.2 U45.5
DIN: JP1.4 U1.7
DIN1: JP4.4 U2.7
DIN2: JP7.4 U3.7
DIN3: JP10.4 U4.7
DIN4: JP13.4 U5.7
DIN5: JP16.4 U6.7
DIN6: JP19.4 U7.7
DIN7: JP22.4 U8.7
DIN8: JP25.4 U9.7
DIN9: JP28.4 U10.7
DIN10: JP31.4 U11.7
DIN11: JP34.4 U12.7
DIN12: JP37.4 U13.7
DIN13: JP40.4 U14.7
DIN14: JP43.4 U15.7
DIN15: JP46.4 U16.7
DIN16: JP49.4 U17.7
DIN17: JP52.4 U18.7
DIN18: JP55.4 U19.7
DIN19: JP58.4 U20.7
DIN20: JP61.4 U21.7
DIN21: JP64.4 U22.7
DIN22: JP67.4 U23.7
DIN23: JP70.4 U24.7
DIN24: JP73.4 U25.7
DIN25: JP76.4 U26.7
DIN26: JP79.4 U27.7
DIN27: JP82.4 U28.7
DIN28: JP85.4 U29.7
DIN29: JP88.4 U30.7
DIN30: JP91.4 U31.7
DIN31: JP94.4 U32.7
DIN32: JP97.4 U33.7
DIN33: JP100.4 U34.7
DIN34: JP103.4 U35.7
DIN35: JP106.4 U36.7
DIN36: JP109.4 U37.7
DIN37: JP112.4 U38.7
DIN38: JP115.4 U39.7
DIN39: JP118.4 U40.7
DIN40: JP121.4 U41.7
DIN41: JP124.4 U42.7
DIN42: JP127.4 U43.7
DIN43: JP130.4 U44.7
DIN44: JP133.4 U45.7
DOUT: JP1.3 U1.6
DOUT1: JP4.3 U2.6
DOUT2: JP7.3 U3.6
DOUT3: JP10.3 U4.6
DOUT4: JP13.3 U5.6
DOUT5: JP16.3 U6.6
DOUT6: JP19.3 U7.6
DOUT7: JP22.3 U8.6
DOUT8: JP25.3 U9.6
DOUT9: JP28.3 U10.6
DOUT10: JP31.3 U11.6
DOUT11: JP34.3 U12.6
DOUT12: JP37.3 U13.6
DOUT13: JP40.3 U14.6
DOUT14: JP43.3 U15.6
DOUT15: JP46.3 U16.6
DOUT16: JP49.3 U17.6
DOUT17: JP52.3 U18.6
DOUT18: JP55.3 U19.6
DOUT19: JP58.3 U20.6
DOUT20: JP61.3 U21.6
DOUT21: JP64.3 U22.6
DOUT22: JP67.3 U23.6
DOUT23: JP70.3 U24.6
DOUT24: JP73.3 U25.6
DOUT25: JP76.3 U26.6
DOUT26: JP79.3 U27.6
DOUT27: JP82.3 U28.6
DOUT28: JP85.3 U29.6
DOUT29: JP88.3 U30.6
DOUT30: JP91.3 U31.6
DOUT31: JP94.3 U32.6
DOUT32: JP97.3 U33.6
DOUT33: JP100.3 U34.6
DOUT34: JP103.3 U35.6
DOUT35: JP106.3 U36.6
DOUT36: JP109.3 U37.6
DOUT37: JP112.3 U38.6
DOUT38: JP115.3 U39.6
DOUT39: JP118.3 U40.6
DOUT40: JP121.3 U41.6
DOUT41: JP124.3 U42.6
DOUT42: JP127.3 U43.6
DOUT43: JP130.3 U44.6
DOUT44: JP133.3 U45.6
GND: C1.2 C2.2 JP1.6 U1.3
GND1: C3.2 C4.2 JP4.6 U2.3
GND2: C5.2 C6.2 JP7.6 U3.3
GND3: C7.2 C8.2 JP10.6 U4.3
GND4: C9.2 C10.2 JP13.6 U5.3
GND5: C11.2 C12.2 JP16.6 U6.3
GND6: C13.2 C14.2 JP19.6 U7.3
GND7: C15.2 C16.2 JP22.6 U8.3
GND8: C17.2 C18.2 JP25.6 U9.3
GND9: C19.2 C20.2 JP28.6 U10.3
GND10: C21.2 C22.2 JP31.6 U11.3
GND11: C23.2 C24.2 JP34.6 U12.3
GND12: C25.2 C26.2 JP37.6 U13.3
GND13: C27.2 C28.2 JP40.6 U14.3
GND14: C29.2 C30.2 JP43.6 U15.3
GND15: C31.2 C32.2 JP46.6 U16.3
GND16: C33.2 C34.2 JP49.6 U17.3
GND17: C35.2 C36.2 JP52.6 U18.3
GND18: C37.2 C38.2 JP55.6 U19.3
GND19: C39.2 C40.2 JP58.6 U20.3
GND20: C41.2 C42.2 JP61.6 U21.3
GND21: C43.2 C44.2 JP64.6 U22.3
GND22: C45.2 C46.2 JP67.6 U23.3
GND23: C47.2 C48.2 JP70.6 U24.3
GND24: C49.2 C50.2 JP73.6 U25.3
GND25: C51.2 C52.2 JP76.6 U26.3
GND26: C53.2 C54.2 JP79.6 U27.3
GND27: C55.2 C56.2 JP82.6 U28.3
GND28: C57.2 C58.2 JP85.6 U29.3
GND29: C59.2 C60.2 JP88.6 U30.3
GND30: C61.2 C62.2 JP91.6 U31.3
GND31: C63.2 C64.2 JP94.6 U32.3
GND32: C65.2 C66.2 JP97.6 U33.3
GND33: C67.2 C68.2 JP100.6 U34.3
GND34: C69.2 C70.2 JP103.6 U35.3
GND35: C71.2 C72.2 JP106.6 U36.3
GND36: C73.2 C74.2 JP109.6 U37.3
GND37: C75.2 C76.2 JP112.6 U38.3
GND38: C77.2 C78.2 JP115.6 U39.3
GND39: C79.2 C80.2 JP118.6 U40.3
GND40: C81.2 C82.2 JP121.6 U41.3
GND41: C83.2 C84.2 JP124.6 U42.3
GND42: C85.2 C86.2 JP127.6 U43.3
GND43: C87.2 C88.2 JP130.6 U44.3
GND44: C89.2 C90.2 JP133.6 U45.3
SCLK: JP1.5 U1.8
SCLK1: JP4.5 U2.8
SCLK2: JP7.5 U3.8
SCLK3: JP10.5 U4.8
SCLK4: JP13.5 U5.8
SCLK5: JP16.5 U6.8
SCLK6: JP19.5 U7.8
SCLK7: JP22.5 U8.8
SCLK8: JP25.5 U9.8
SCLK9: JP28.5 U10.8
SCLK10: JP31.5 U11.8
SCLK11: JP34.5 U12.8
SCLK12: JP37.5 U13.8
SCLK13: JP40.5 U14.8
SCLK14: JP43.5 U15.8
SCLK15: JP46.5 U16.8
SCLK16: JP49.5 U17.8
SCLK17: JP52.5 U18.8
SCLK18: JP55.5 U19.8
SCLK19: JP58.5 U20.8
SCLK20: JP61.5 U21.8
SCLK21: JP64.5 U22.8
SCLK22: JP67.5 U23.8
SCLK23: JP70.5 U24.8
SCLK24: JP73.5 U25.8
SCLK25: JP76.5 U26.8
SCLK26: JP79.5 U27.8
SCLK27: JP82.5 U28.8
SCLK28: JP85.5 U29.8
SCLK29: JP88.5 U30.8
SCLK30: JP91.5 U31.8
SCLK31: JP94.5 U32.8
SCLK32: JP97.5 U33.8
SCLK33: JP100.5 U34.8
SCLK34: JP103.5 U35.8
SCLK35: JP106.5 U36.8
SCLK36: JP109.5 U37.8
SCLK37: JP112.5 U38.8
SCLK38: JP115.5 U39.8
SCLK39: JP118.5 U40.8
SCLK40: JP121.5 U41.8
SCLK41: JP124.5 U42.8
SCLK42: JP127.5 U43.8
SCLK43: JP130.5 U44.8
SCLK44: JP133.5 U45.8
SHDN: JP1.1 U1.4
SHDN1: JP4.1 U2.4
SHDN2: JP7.1 U3.4
SHDN3: JP10.1 U4.4
SHDN4: JP13.1 U5.4
SHDN5: JP16.1 U6.4
SHDN6: JP19.1 U7.4
SHDN7: JP22.1 U8.4
SHDN8: JP25.1 U9.4
SHDN9: JP28.1 U10.4
SHDN10: JP31.1 U11.4
SHDN11: JP34.1 U12.4
SHDN12: JP37.1 U13.4
SHDN13: JP40.1 U14.4
SHDN14: JP43.1 U15.4
SHDN15: JP46.1 U16.4
SHDN16: JP49.1 U17.4
SHDN17: JP52.1 U18.4
SHDN18: JP55.1 U19.4
SHDN19: JP58.1 U20.4
SHDN20: JP61.1 U21.4
SHDN21: JP64.1 U22.4
SHDN22: JP67.1 U23.4
SHDN23: JP70.1 U24.4
SHDN24: JP73.1 U25.4
SHDN25: JP76.1 U26.4
SHDN26: JP79.1 U27.4
SHDN27: JP82.1 U28.4
SHDN28: JP85.1 U29.4
SHDN29: JP88.1 U30.4
SHDN30: JP91.1 U31.4
SHDN31: JP94.1 U32.4
SHDN32: JP97.1 U33.4
SHDN33: JP100.1 U34.4
SHDN34: JP103.1 U35.4
SHDN35: JP106.1 U36.4
SHDN36: JP109.1 U37.4
SHDN37: JP112.1 U38.4
SHDN38: JP115.1 U39.4
SHDN39: JP118.1 U40.4
SHDN40: JP121.1 U41.4
SHDN41: JP124.1 U42.4
SHDN42: JP127.1 U43.4
SHDN43: JP130.1 U44.4
SHDN44: JP133.1 U45.4
VDD: C2.1 JP1.7 U1.1
VDD1: C4.1 JP4.7 U2.1
VDD2: C6.1 JP7.7 U3.1
VDD3: C8.1 JP10.7 U4.1
VDD4: C10.1 JP13.7 U5.1
VDD5: C12.1 JP16.7 U6.1
VDD6: C14.1 JP19.7 U7.1
VDD7: C16.1 JP22.7 U8.1
VDD8: C18.1 JP25.7 U9.1
VDD9: C20.1 JP28.7 U10.1
VDD10: C22.1 JP31.7 U11.1
VDD11: C24.1 JP34.7 U12.1
VDD12: C26.1 JP37.7 U13.1
VDD13: C28.1 JP40.7 U14.1
VDD14: C30.1 JP43.7 U15.1
VDD15: C32.1 JP46.7 U16.1
VDD16: C34.1 JP49.7 U17.1
VDD17: C36.1 JP52.7 U18.1
VDD18: C38.1 JP55.7 U19.1
VDD19: C40.1 JP58.7 U20.1
VDD20: C42.1 JP61.7 U21.1
VDD21: C44.1 JP64.7 U22.1
VDD22: C46.1 JP67.7 U23.1
VDD23: C48.1 JP70.7 U24.1
VDD24: C50.1 JP73.7 U25.1
VDD25: C52.1 JP76.7 U26.1
VDD26: C54.1 JP79.7 U27.1
VDD27: C56.1 JP82.7 U28.1
VDD28: C58.1 JP85.7 U29.1
VDD29: C60.1 JP88.7 U30.1
VDD30: C62.1 JP91.7 U31.1
VDD31: C64.1 JP94.7 U32.1
VDD32: C66.1 JP97.7 U33.1
VDD33: C68.1 JP100.7 U34.1
VDD34: C70.1 JP103.7 U35.1
VDD35: C72.1 JP106.7 U36.1
VDD36: C74.1 JP109.7 U37.1
VDD37: C76.1 JP112.7 U38.1
VDD38: C78.1 JP115.7 U39.1
VDD39: C80.1 JP118.7 U40.1
VDD40: C82.1 JP121.7 U41.1
VDD41: C84.1 JP124.7 U42.1
VDD42: C86.1 JP127.7 U43.1
VDD43: C88.1 JP130.7 U44.1
VDD44: C90.1 JP133.7 U45.1